# Altium PCB 底板20160428.PcbDoc (part 4 of 5)
Units mm, origin at the board's own origin, x right, y up, seen from the top; angles counter-clockwise.
Board outline 123.5 x 102.51 mm, 2 copper layers (Top Layer, Bottom Layer); 219 components, 217 nets, 791 pads, 260 vias.
Unrouted connection lines stored in the file: 1.
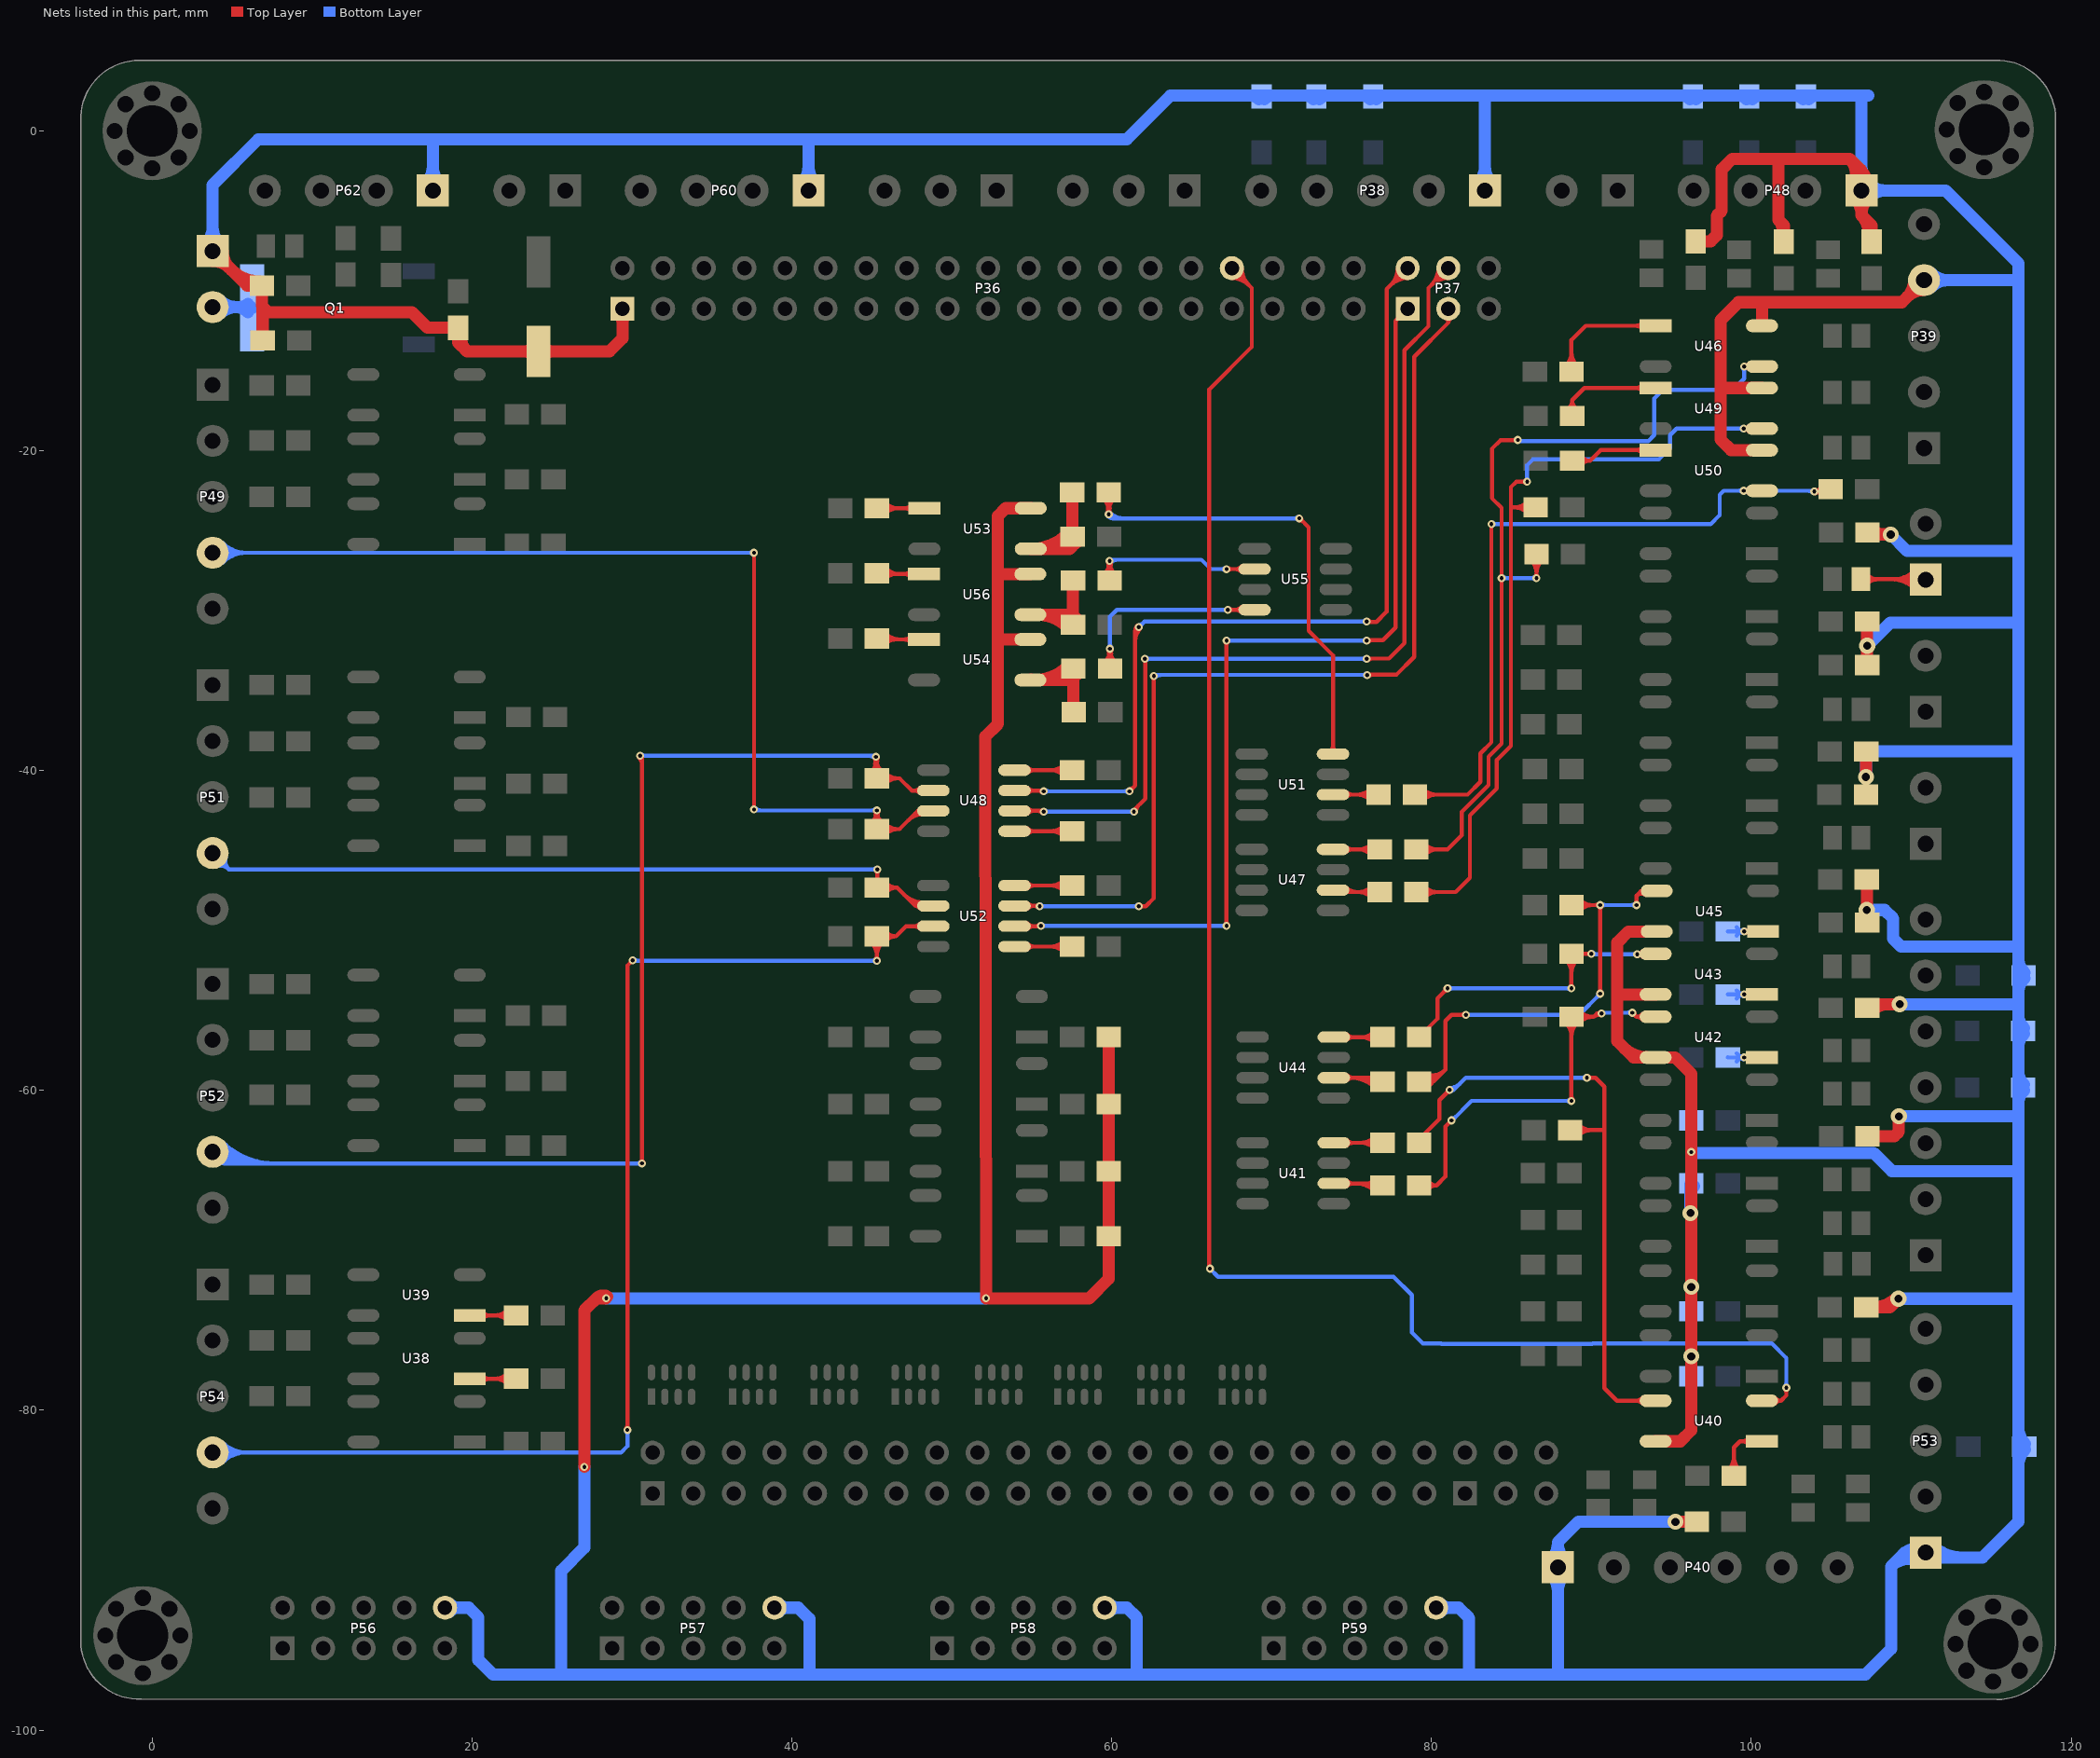
[diagram p4: the nets of this part, all layers, seen from the top]

## Via types
v1: diameter 0.5, hole 0.25, Top Layer to Bottom Layer, 233 vias
v2: diameter 1, hole 0.5, Top Layer to Bottom Layer, 27 vias

## Nets (pads, with @x,y where several pads share a name; then routed paths per layer and width w, separated by ;. In a path a pad name is that pad's centre, name@x,y a point inside that pad or via, vN(x,y) a via of type N, cw(c..) or ccw(c..) an arc to the next point about the centre after c; other vN are vias at no path point) (continued)
NetR92_1: R92.1 U38.1 | length 5.9
  Top Layer w0.254: U38.1@19.862,-78.029 R92.1@22.758,-78.029 ; U38.1@20.651,-78.225 cw(c21.126,-78.7) 21.126,-78.029 ; U38.1@20.651,-77.839 ccw(c21.108,-77.382) 21.108,-78.029 ; R92.1@22.272,-78.388 ccw(c21.405,-79.255) 21.405,-78.029 ccw(c21.405,-76.802) R92.1@22.272,-77.67
NetR94_1: R94.1 U39.1 | length 5.9
  Top Layer w0.254: U39.1@19.859,-74.066 R94.1@22.758,-74.066 ; U39.1@20.651,-74.258 cw(c21.115,-74.722) 21.115,-74.066 ; U39.1@20.651,-73.872 ccw(c21.12,-73.404) 21.12,-74.066 ; R94.1@22.272,-74.426 ccw(c21.405,-75.293) 21.405,-74.066 ccw(c21.405,-72.84) R94.1@22.272,-73.707
NetR96_1: R96.1 U40.1 | length 6.7
  Top Layer w0.254: R96.1@98.548,-83.74 ccw(c97.681,-82.873) 98.908,-82.873 ccw(c100.134,-82.873) R96.1@99.267,-83.74 ; R96.1@98.908,-84.099 98.908,-82.321 99.29,-81.939 U40.1@100.66,-81.939 U40.1@100.732,-81.939 ; U40.1@99.867,-82.132 ccw(c99.401,-82.598) 99.401,-81.939 ccw(c99.401,-81.28) U40.1@99.867,-81.746
NetR98_2: R98.2 R99.2 U40.4 | length 44.3
  Top Layer w0.254: R98.2@79.223,-63.271 79.223,-63.061 80.493,-61.791 80.493,-60.604 v1(81.128,-59.969) ; v1@81.005,-59.969 cw(c80.708,-59.969) 80.918,-60.179 cw(c81.128,-60.389) v1@81.128,-60.092 ; R99.2@88.671,-62.484 90.805,-62.484 ; R99.2@89.158,-62.843 cw(c90.025,-63.71) 90.025,-62.484 cw(c90.025,-61.258) R99.2@89.158,-62.125 ; v1(89.713,-59.207) 90.246,-59.207 90.805,-59.766 90.805,-62.484 ; v1@89.8,-59.294 cw(c90.01,-59.504) 90.01,-59.207 cw(c90.01,-58.91) v1@89.8,-59.12 ; U40.4@93.217,-79.592 ccw(c92.751,-80.058) 92.751,-79.399 ccw(c92.751,-78.74) U40.4@93.217,-79.206 ; U40.4@94.082,-79.399 U40.4@94.01,-79.399 91.591,-79.399 90.805,-78.613 90.805,-62.484
  Bottom Layer w0.254: v1(81.128,-59.969) 81.382,-59.969 ; v1@81.128,-59.846 ccw(c81.128,-58.936) 81.771,-59.58 ; v1@81.224,-60.046 cw(c81.382,-60.17) 81.382,-59.969 ; v1@81.224,-59.893 ccw(c81.382,-59.769) 81.382,-59.969 ; v1@89.626,-59.294 ccw(c89.416,-59.504) 89.416,-59.207 ccw(c89.416,-58.91) v1@89.626,-59.12 ; v1(89.713,-59.207) 82.144,-59.207 81.382,-59.969
NetR100_1: R100.1 U42.1 | length 5.7
  Top Layer w0.254: v1(99.544,-57.938) v1(99.544,-57.938) ; v1@99.631,-58.025 cw(c99.845,-58.24) U42.1@99.845,-57.936 ; v1@99.631,-57.851 ccw(c99.836,-57.646) U42.1@99.836,-57.936 ; U42.1@99.835,-58.09 ccw(c99.544,-58.289) v1(99.544,-57.938) ; U42.1@99.835,-57.783 cw(c99.544,-57.584) v1(99.544,-57.938) ; U42.1@100.732,-57.936 U42.1@100.66,-57.936 v1(99.544,-57.938)
  Bottom Layer w0.254: R100.1@98.527,-57.937 R100.1@98.527,-57.937 v1(99.544,-57.938) ; R100.1@99.091,-58.196 cw(c99.544,-58.465) v1(99.544,-57.938) ; R100.1@99.091,-57.68 ccw(c99.544,-57.414) v1(99.544,-57.938) ; v1@99.433,-57.993 ccw(c99.22,-58.098) 99.281,-57.868 ccw(c99.343,-57.638) v1@99.475,-57.836 ; v1@99.433,-57.884 cw(c99.218,-57.777) 99.28,-58.009 cw(c99.343,-58.241) v1@99.476,-58.041 ; v1@99.457,-58.025 ccw(c99.247,-58.235) 99.247,-57.938 ccw(c99.247,-57.641) v1@99.457,-57.851
NetR102_2: R102.2 R103.2 U42.4 | length 33.4
  Top Layer w0.254: R102.2@79.223,-65.938 80.315,-65.938 ; R102.2@79.768,-66.226 cw(c80.315,-66.601) 80.315,-65.938 ; R102.2@79.768,-65.651 ccw(c80.315,-65.276) 80.315,-65.938 ; v1(81.255,-61.874) 80.874,-62.255 80.874,-65.38 80.315,-65.938 ; R103.2@88.388,-55.757 cw(c87.521,-56.624) 88.748,-56.624 cw(c89.974,-56.624) R103.2@89.107,-55.757 ; v1@88.661,-60.568 ccw(c88.451,-60.358) 88.748,-60.358 ccw(c89.045,-60.358) v1@88.835,-60.568 ; v1(88.748,-60.655) R103.2@88.748,-55.397 90.145,-55.397 ; R103.2@89.234,-55.757 cw(c90.101,-56.624) 90.101,-55.397 cw(c90.101,-54.171) R103.2@89.234,-55.038 ; v1@90.536,-55.277 ccw(c90.348,-55.45) 90.348,-55.194 ; v1@90.536,-55.111 cw(c90.348,-54.938) 90.348,-55.194 ; v1@90.581,-55.308 ccw(c90.43,-55.683) 90.145,-55.397 ; v1(90.627,-55.194) 90.348,-55.194 ; v1@92.558,-55.266 cw(c92.558,-55.563) 92.768,-55.353 cw(c92.978,-55.143) v1@92.681,-55.143 ; v1(92.558,-55.143) 92.811,-55.396 ; U42.4@93.204,-55.576 ccw(c92.811,-55.918) 92.811,-55.396 ; U42.4@93.204,-55.217 cw(c92.811,-54.875) 92.811,-55.396 ; U42.4@94.081,-55.397 94.082,-55.396 U42.4@94.01,-55.396 92.811,-55.396 ; 90.145,-55.397 90.348,-55.194
  Bottom Layer w0.254: v1(81.255,-61.874) 81.287,-61.874 82.506,-60.655 v1(88.748,-60.655) ; v1@81.255,-61.751 ccw(c81.255,-61.376) 81.52,-61.641 ; v1@88.661,-60.742 ccw(c88.451,-60.952) 88.451,-60.655 ccw(c88.451,-60.358) v1@88.661,-60.568 ; v1(90.627,-55.194) 90.627,-55.169 90.653,-55.143 v1(92.558,-55.143) ; v1@92.471,-55.23 ccw(c92.261,-55.44) 92.261,-55.143 ccw(c92.261,-54.846) v1@92.471,-55.056
NetR104_1: R104.1 U43.1 | length 5.7
  Top Layer w0.254: v1(99.543,-54) v1(99.543,-54) ; v1@99.63,-54.087 cw(c99.842,-54.3) U43.1@99.842,-53.999 ; v1@99.63,-53.913 ccw(c99.837,-53.706) U43.1@99.837,-53.999 ; U43.1@99.835,-54.153 ccw(c99.544,-54.352) v1(99.543,-54) ; U43.1@99.835,-53.846 cw(c99.544,-53.647) v1(99.543,-54) ; U43.1@100.732,-53.999 U43.1@100.66,-53.999 v1(99.543,-54)
  Bottom Layer w0.254: R104.1@98.527,-54 v1(99.543,-54) ; R104.1@99.091,-54.258 cw(c99.543,-54.524) v1(99.543,-54) ; R104.1@99.091,-53.743 ccw(c99.543,-53.477) v1(99.543,-54) ; v1@99.432,-54.055 ccw(c99.219,-54.16) 99.281,-53.93 ccw(c99.342,-53.701) v1@99.474,-53.898 ; v1@99.432,-53.946 cw(c99.219,-53.841) 99.281,-54.071 cw(c99.342,-54.3) v1@99.474,-54.103 ; v1@99.456,-54.087 ccw(c99.246,-54.297) 99.246,-54 ccw(c99.246,-53.703) v1@99.456,-53.913
NetR107_2: R107.2 R108.2 U43.4 | length 24.9
  Top Layer w0.254: R107.2@79.731,-56.667 R107.2@79.223,-56.667 80.366,-55.524 80.366,-54.254 v1(81.001,-53.619) ; v1@80.878,-53.619 cw(c80.581,-53.619) 80.791,-53.829 cw(c81.001,-54.039) v1@81.001,-53.742 ; R108.2@88.388,-51.82 cw(c87.521,-52.687) 88.748,-52.687 cw(c89.974,-52.687) R108.2@89.107,-51.82 ; v1@88.661,-53.532 ccw(c88.451,-53.322) 88.748,-53.322 ccw(c89.045,-53.322) v1@88.835,-53.532 ; v1(88.748,-53.619) R108.2@88.748,-51.46 v1(89.992,-51.46) ; v1@92.949,-51.573 cw(c93.159,-51.783) 93.159,-51.486 cw(c93.159,-51.189) v1@92.949,-51.399 ; U43.4@93.18,-51.312 cw(c92.862,-51.108) v1(92.862,-51.486) ; U43.4@93.206,-51.64 ccw(c92.862,-51.944) v1(92.862,-51.486) ; U43.4@94.081,-51.46 94.082,-51.459 U43.4@94.01,-51.459 93.984,-51.486 v1(92.862,-51.486)
  Bottom Layer w0.254: v1(81.001,-53.619) v1(88.748,-53.619) ; v1@81.088,-53.706 cw(c81.298,-53.916) 81.298,-53.619 cw(c81.298,-53.322) v1@81.088,-53.532 ; v1@88.661,-53.706 ccw(c88.451,-53.916) 88.451,-53.619 ccw(c88.451,-53.322) v1@88.661,-53.532 ; v1(89.992,-51.46) 90.018,-51.486 v1(92.862,-51.486) ; v1@90.079,-51.373 ccw(c90.35,-51.102) 90.35,-51.486
NetR109_1: R109.1 U45.1 | length 6.6
  Top Layer w0.254: v1(99.543,-50.063) v1(99.543,-50.063) ; v1@99.614,-49.963 ccw(c99.738,-49.789) 99.793,-49.996 ccw(c99.848,-50.2) v1@99.655,-50.114 ; v1@99.616,-50.162 cw(c99.738,-50.323) 99.79,-50.128 cw(c99.843,-49.929) v1@99.655,-50.013 ; v1@99.63,-50.15 cw(c99.842,-50.363) U45.1@99.842,-50.062 ; v1@99.63,-49.976 ccw(c99.837,-49.769) U45.1@99.837,-50.062 ; U45.1@99.923,-50.239 ccw(c99.544,-50.559) v1(99.543,-50.063) ; U45.1@99.923,-49.886 cw(c99.544,-49.566) v1(99.543,-50.063) ; U45.1@100.732,-50.062 v1(99.543,-50.063)
  Bottom Layer w0.254: R109.1@98.527,-50.063 v1(99.543,-50.063) ; R109.1@99.091,-50.321 cw(c99.543,-50.587) v1(99.543,-50.063) ; R109.1@99.091,-49.806 ccw(c99.543,-49.54) v1(99.543,-50.063) ; v1@99.432,-50.118 ccw(c99.219,-50.223) 99.281,-49.993 ccw(c99.342,-49.764) v1@99.474,-49.961 ; v1@99.432,-50.009 cw(c99.219,-49.904) 99.281,-50.134 cw(c99.342,-50.363) v1@99.474,-50.166 ; v1@99.456,-50.15 ccw(c99.246,-50.36) 99.246,-50.063 ccw(c99.246,-49.766) v1@99.456,-49.976
NetR111_2: R111.2 R112.2 U45.4 | length 39
  Top Layer w0.254: R111.2@79.223,-59.461 80.112,-59.461 ; R111.2@79.259,-59.699 ccw(c79.521,-59.011) 80.042,-59.531 ; R111.2@79.35,-59.461 ccw(c79.674,-58.609) 80.319,-59.254 ; R111.2@79.44,-59.224 ccw(c79.827,-58.208) 80.596,-58.977 ; R111.2@79.53,-58.987 ccw(c79.98,-57.806) 80.874,-58.699 ; R111.2@79.819,-59.657 cw(c80.112,-59.779) 80.112,-59.461 ; R111.2@79.819,-59.266 ccw(c80.112,-59.144) 80.112,-59.461 ; v1@82.057,-55.357 ccw(c81.847,-55.567) 81.847,-55.27 ccw(c81.847,-54.973) v1@82.057,-55.183 ; v1(82.144,-55.27) 81.255,-55.27 80.874,-55.651 80.874,-58.699 ; R112.2@88.748,-48.412 v1(90.551,-48.412) v1(90.551,-53.95) ; R112.2@89.234,-48.772 cw(c90.101,-49.639) 90.101,-48.412 cw(c90.101,-47.186) R112.2@89.234,-48.053 ; v1@90.464,-53.863 ccw(c90.254,-53.653) 90.551,-53.653 ccw(c90.848,-53.653) v1@90.638,-53.863 ; v1@90.464,-48.325 cw(c90.254,-48.115) 90.254,-48.412 cw(c90.254,-48.709) 90.464,-48.499 cw(c90.254,-48.709) 90.551,-48.709 cw(c90.848,-48.709) v1@90.638,-48.499 ; v1@92.725,-48.325 ccw(c92.515,-48.115) 92.812,-48.115 ccw(c93.109,-48.115) v1@92.899,-48.325 ; v1(92.812,-48.412) 92.812,-47.828 ; 93.045,-47.595 cw(c93.295,-47.844) U45.4@93.472,-47.539 ; U45.4@93.345,-47.759 ccw(c93.123,-48.14) 92.812,-47.828 ; U45.4@94.082,-47.522 93.117,-47.522 92.812,-47.828 ; 80.112,-59.461 80.874,-58.699
  Bottom Layer w0.254: v1(82.144,-55.27) 89.23,-55.27 v1(90.551,-53.95) ; v1@90.428,-53.95 cw(c90.131,-53.95) 90.341,-54.16 cw(c90.551,-54.37) v1@90.551,-54.073 ; v1(90.551,-48.412) v1(92.812,-48.412) ; v1@90.638,-48.499 cw(c90.848,-48.709) 90.848,-48.412 cw(c90.848,-48.115) v1@90.638,-48.325 ; v1@92.725,-48.499 ccw(c92.515,-48.709) 92.515,-48.412 ccw(c92.515,-48.115) v1@92.725,-48.325
NetR113_1: R113.1 U46.1 | length 10.6
  Top Layer w0.254: R113.1@88.388,-14.703 ccw(c87.521,-13.836) 88.748,-13.836 ccw(c89.974,-13.836) R113.1@89.107,-14.703 ; R113.1@88.748,-15.062 88.748,-13.081 89.636,-12.193 U46.1@94.01,-12.193 ; U46.1@93.217,-12.386 ccw(c92.751,-12.852) 92.751,-12.193 ccw(c92.751,-11.534) U46.1@93.217,-12
NetR115_1: R115.1 U48.4 | length 6.4
  Top Layer w0.254: U48.4@53.924,-39.98 R115.1@57.531,-39.98 ; U48.4@54.746,-40.141 cw(c55.136,-40.531) 55.136,-39.98 cw(c55.136,-39.428) U48.4@54.746,-39.818 ; R115.1@57.045,-40.339 ccw(c56.178,-41.206) 56.178,-39.98 ccw(c56.178,-38.753) R115.1@57.045,-39.62
NetR116_2: R116.2 R118.2 U46.4 | length 60.4
  Top Layer w0.254: R116.2@79.045,-44.933 81.001,-44.933 81.89,-44.044 81.89,-42.589 83.566,-40.912 83.566,-39.134 84.379,-38.321 v1(84.379,-27.965) 84.379,-23.571 83.776,-22.968 83.776,-19.882 84.303,-19.355 85.369,-19.355 v1(85.395,-19.329) ; R116.2@79.531,-45.292 cw(c80.398,-46.159) 80.398,-44.933 cw(c80.398,-43.706) R116.2@79.531,-44.573 ; 85.037,-19.355 ccw(c85.037,-18.971) v1@85.308,-19.242 ; R118.2@86.204,-26.826 cw(c85.337,-27.693) 86.563,-27.693 cw(c87.79,-27.693) R118.2@86.922,-26.826 ; v1@86.476,-27.878 ccw(c86.266,-27.668) 86.563,-27.668 ccw(c86.86,-27.668) v1@86.65,-27.878 ; v1(86.563,-27.965) R118.2@86.563,-26.467 ; v1@99.631,-14.82 cw(c99.841,-15.03) 99.841,-14.733 cw(c99.841,-14.436) v1@99.631,-14.646 ; U46.4@99.835,-14.887 ccw(c99.544,-15.085) v1(99.544,-14.733) ; U46.4@99.835,-14.579 cw(c99.544,-14.381) v1(99.544,-14.733) ; U46.4@100.66,-14.733 v1(99.544,-14.733)
  Bottom Layer w0.254: v1(84.379,-27.965) v1(86.563,-27.965) ; v1@84.466,-28.052 cw(c84.676,-28.262) 84.676,-27.965 cw(c84.676,-27.668) v1@84.466,-27.878 ; v1(85.395,-19.329) 85.466,-19.4 93.554,-19.4 93.929,-19.025 93.929,-16.739 94.463,-16.205 98.831,-16.205 99.544,-15.493 v1(99.544,-14.733) ; v1@86.476,-28.052 ccw(c86.266,-28.262) 86.266,-27.965 ccw(c86.266,-27.668) v1@86.476,-27.878 ; v1@99.457,-14.82 cw(c99.247,-15.03) 99.544,-15.03 cw(c99.841,-15.03) v1@99.631,-14.82
NetR119_1: R119.1 U49.1 | length 8.9
  Top Layer w0.254: R119.1@88.502,-17.418 ccw(c88.087,-16.84) 88.798,-16.84 ; R119.1@88.798,-17.831 88.798,-16.84 ; R119.1@89.095,-17.418 cw(c89.51,-16.84) 88.798,-16.84 ; U49.1@93.217,-16.272 ccw(c92.751,-16.738) 92.751,-16.079 ccw(c92.751,-15.42) U49.1@93.217,-15.886 ; U49.1@94.01,-16.079 89.559,-16.079 88.798,-16.84
NetR122_1: R122.1 U48.1 | length 6.4
  Top Layer w0.254: U48.1@53.924,-43.79 R122.1@57.531,-43.79 ; U48.1@54.746,-43.951 cw(c55.136,-44.341) 55.136,-43.79 cw(c55.136,-43.238) U48.1@54.746,-43.628 ; R122.1@57.045,-44.149 ccw(c56.178,-45.016) 56.178,-43.79 ccw(c56.178,-42.563) R122.1@57.045,-43.43
NetR123_2: R123.2 R124.2 U49.4 | length 55.5
  Top Layer w0.254: R123.2@79.045,-47.6 81.509,-47.6 82.398,-46.711 82.398,-42.799 84.074,-41.123 84.074,-39.345 84.963,-38.456 84.963,-23.571 ; R123.2@79.531,-47.959 cw(c80.398,-48.826) 80.398,-47.6 cw(c80.398,-46.373) R123.2@79.531,-47.24 ; v1@85.892,-22.033 ccw(c85.682,-22.243) 85.682,-21.946 ccw(c85.682,-21.649) v1@85.892,-21.859 ; v1(85.979,-21.946) 85.293,-21.946 84.963,-22.276 84.963,-23.571 ; R124.2@86.026,-23.905 ccw(c85.159,-24.772) 85.159,-23.546 ccw(c85.159,-22.319) R124.2@86.026,-23.187 ; R124.2@86.512,-23.546 84.988,-23.546 84.963,-23.571 ; v1@99.605,-18.706 cw(c99.815,-18.916) 99.815,-18.619 cw(c99.815,-18.322) v1@99.605,-18.532 ; U49.4@99.841,-18.782 ccw(c99.518,-19.021) v1(99.518,-18.619) ; U49.4@99.841,-18.457 cw(c99.518,-18.218) v1(99.518,-18.619) ; U49.4@100.66,-18.619 v1(99.518,-18.619)
  Bottom Layer w0.254: v1@85.892,-21.859 ccw(c85.682,-21.649) 85.979,-21.649 ccw(c86.276,-21.649) v1@86.066,-21.859 ; v1(85.979,-21.946) 85.979,-20.904 86.335,-20.549 94.209,-20.549 94.92,-19.837 94.92,-19.025 95.325,-18.619 v1(99.518,-18.619) ; v1@99.431,-18.706 ccw(c99.221,-18.916) 99.221,-18.619 ccw(c99.221,-18.322) v1@99.431,-18.532
NetR125_1: R125.1 U50.1 | length 7.9
  Top Layer w0.254: R125.1@88.798,-20.625 89.916,-20.625 ; R125.1@89.338,-20.921 cw(c89.916,-21.337) 89.916,-20.625 ; R125.1@89.338,-20.328 ccw(c89.916,-19.913) 89.916,-20.625 ; U50.1@93.217,-20.158 ccw(c92.751,-20.624) 92.751,-19.965 ccw(c92.751,-19.306) U50.1@93.217,-19.772 ; U50.1@94.01,-19.965 90.575,-19.965 89.916,-20.625
NetR127_2: R127.2 R128.2 U50.4 | length 51.7
  Top Layer w0.254: R127.2@78.969,-41.504 82.256,-41.504 83.058,-40.702 83.058,-38.924 83.744,-38.238 v1(83.744,-24.587) ; R127.2@79.455,-41.863 cw(c80.322,-42.73) 80.322,-41.504 cw(c80.322,-40.277) R127.2@79.455,-41.144 ; v1@99.605,-22.592 cw(c99.815,-22.802) 99.815,-22.505 cw(c99.815,-22.208) v1@99.605,-22.418 ; U50.4@99.841,-22.668 ccw(c99.518,-22.907) v1(99.518,-22.505) ; U50.4@99.841,-22.343 cw(c99.518,-22.104) v1(99.518,-22.505) ; U50.4@100.66,-22.505 v1(99.518,-22.505) ; v1@103.967,-22.555 cw(c103.967,-23.261) R128.2@104.467,-22.762 ; v1@103.998,-22.662 cw(c104.16,-22.942) R128.2@104.244,-22.629 ; v1@104.024,-22.642 cw(c104.234,-22.852) 104.234,-22.555 cw(c104.234,-22.258) v1@104.024,-22.468 ; v1@104.043,-22.494 ccw(c104.277,-22.359) R128.2@104.207,-22.619 ; R128.2@104.339,-22.256 cw(c103.937,-22.135) v1(103.937,-22.555) R128.2@104.953,-22.555
  Bottom Layer w0.254: v1(83.744,-24.587) 97.46,-24.587 98.019,-24.028 98.019,-22.758 98.272,-22.505 v1(99.518,-22.505) 103.887,-22.505 v1(103.937,-22.555) ; v1@83.831,-24.674 cw(c84.041,-24.884) 84.041,-24.587 cw(c84.041,-24.29) v1@83.831,-24.5 ; v1@99.431,-22.592 ccw(c99.221,-22.802) 99.221,-22.505 ccw(c99.221,-22.208) v1@99.431,-22.418 ; v1@99.605,-22.592 cw(c99.815,-22.802) 99.815,-22.505 cw(c99.815,-22.208) v1@99.605,-22.418 ; 103.52,-22.505 cw(c103.52,-22.972) v1@103.85,-22.642
NetR129_1: R129.1 U52.4 | length 6.4
  Top Layer w0.254: U52.4@53.924,-47.193 R129.1@57.531,-47.193 ; U52.4@54.746,-47.355 cw(c55.136,-47.745) 55.136,-47.193 cw(c55.136,-46.641) U52.4@54.746,-47.032 ; R129.1@57.045,-47.552 ccw(c56.178,-48.42) 56.178,-47.193 ccw(c56.178,-45.967) R129.1@57.045,-46.834
NetR130_1: R130.1 U53.1 | length 5.9
  Top Layer w0.254: R130.1@45.314,-23.597 U53.1@48.29,-23.598 ; R130.1@45.8,-23.956 cw(c46.665,-24.821) 46.665,-23.598 ; R130.1@45.8,-23.237 ccw(c46.669,-22.368) 46.669,-23.598 ; U53.1@47.497,-23.791 ccw(c47.031,-24.257) 47.031,-23.598 ccw(c47.031,-22.939) U53.1@47.497,-23.405
NetR133_2: R133.2 R135.2 U53.4 | length 10.2
  Top Layer w0.762: U53.4@54.94,-26.138 U53.4@54.94,-26.138 57.378,-26.138 57.531,-25.984 R133.2@57.531,-22.606 ; U53.4@54.974,-26.138 ccw(c54.974,-22.919) R135.2@57.25,-25.195 ; 56.814,-26.138 ccw(c56.814,-24.759) R135.2@57.789,-25.734 ; 57.531,-24.7 ccw(c58.231,-24.7) R135.2@57.736,-25.195
NetR136_1: R136.1 U52.1 | length 6.4
  Top Layer w0.254: U52.1@53.924,-51.003 R136.1@57.531,-51.003 ; U52.1@54.746,-51.165 cw(c55.136,-51.555) 55.136,-51.003 cw(c55.136,-50.451) U52.1@54.746,-50.842 ; R136.1@57.045,-51.362 ccw(c56.178,-52.23) 56.178,-51.003 ccw(c56.178,-49.777) R136.1@57.045,-50.644
NetR137_1: R137.1 U54.1 | length 6.5
  Top Layer w0.254: R137.1@45.365,-31.802 U54.1@48.265,-31.802 ; R137.1@45.62,-31.57 ccw(c46.179,-31.012) 46.179,-31.802 ; R137.1@45.8,-32.109 cw(c46.542,-32.851) 46.542,-31.802 ; R137.1@45.8,-31.391 ccw(c46.792,-30.398) 46.792,-31.802 ; U54.1@47.472,-31.995 ccw(c47.006,-32.461) 47.006,-31.802 ccw(c47.006,-31.143) U54.1@47.472,-31.609
NetR139_2: R139.2 R140.2 U54.4 | length 8.7
  Top Layer w0.762: U54.4@54.941,-34.315 U54.4@54.915,-34.342 57.53,-34.342 57.607,-34.265 57.607,-36.322 R140.2@57.633,-36.347 ; U54.4@55.148,-34.342 ccw(c55.148,-31.297) R139.2@57.301,-33.45 ; 56.987,-34.342 ccw(c56.987,-33.137) R139.2@57.839,-33.989 ; 57.607,-35.673 ccw(c58.307,-35.673) R140.2@57.812,-36.168
NetR141_1: R141.1 U56.1 | length 6.5
  Top Layer w0.254: R141.1@45.365,-27.712 U56.1@48.265,-27.712 ; R141.1@45.62,-27.481 ccw(c46.179,-26.922) 46.179,-27.712 ; R141.1@45.8,-28.02 cw(c46.542,-28.762) 46.542,-27.712 ; R141.1@45.8,-27.301 ccw(c46.792,-26.309) 46.792,-27.712 ; U56.1@47.472,-27.905 ccw(c47.006,-28.371) 47.006,-27.712 ccw(c47.006,-27.053) U56.1@47.472,-27.519
NetR143_2: R143.2 R144.2 U56.4 | length 7.7
  Top Layer w0.762: U56.4@54.915,-30.252 U56.4@54.915,-30.252 57.505,-30.252 57.582,-30.175 R143.2@57.582,-28.118 ; U56.4@55.311,-30.252 cw(c55.311,-33.03) R144.2@57.275,-31.066 ; R144.2@57.151,-30.252 cw(c57.151,-31.191) R144.2@57.814,-30.527
O13: R98.1 U41.4 | length 5.8
  Top Layer w0.254: U41.4@73.882,-63.279 R98.1@76.929,-63.279 ; U41.4@74.711,-63.433 cw(c75.082,-63.805) 75.082,-63.279 ; U41.4@74.711,-63.11 ccw(c75.119,-62.701) 75.119,-63.279 ; 75.565,-63.279 ccw(c75.565,-62.027) R98.1@76.45,-62.912 ; 75.602,-63.279 cw(c75.602,-64.479) R98.1@76.45,-63.631
O14: R102.1 U41.2 | length 6.5
  Top Layer w0.254: U41.2@73.882,-65.819 R102.1@76.817,-65.819 ; U41.2@74.711,-65.973 cw(c75.082,-66.345) 75.082,-65.819 ; U41.2@74.711,-65.65 ccw(c75.119,-65.241) 75.119,-65.819 ; 75.295,-65.819 cw(c75.295,-67.453) R102.1@76.45,-66.298 ; 75.871,-65.819 ccw(c75.871,-65) R102.1@76.45,-65.579 ; 75.908,-65.819 cw(c75.908,-66.84) R102.1@76.63,-66.118
O15: R107.1 U44.4 | length 5.8
  Top Layer w0.254: U44.4@73.882,-56.675 R107.1@76.929,-56.675 ; U44.4@74.711,-56.829 cw(c75.082,-57.201) 75.082,-56.675 ; U44.4@74.711,-56.506 ccw(c75.119,-56.097) 75.119,-56.675 ; 75.565,-56.675 ccw(c75.565,-55.423) R107.1@76.45,-56.308 ; 75.602,-56.675 cw(c75.602,-57.875) R107.1@76.45,-57.027
O16: R111.1 U44.2 | length 7.4
  Top Layer w0.254: U44.2@73.882,-59.215 R111.1@76.69,-59.215 ; U44.2@74.711,-59.369 cw(c75.082,-59.741) 75.082,-59.215 ; U44.2@74.711,-59.046 ccw(c75.119,-58.637) 75.119,-59.215 ; 74.988,-59.215 cw(c74.988,-61.283) R111.1@76.45,-59.821 ; 75.602,-59.215 cw(c75.602,-60.669) R111.1@76.63,-59.641 ; R111.1@76.178,-59.215 ccw(c76.178,-58.83) R111.1@76.45,-59.102 ; R111.1@76.215,-59.215 cw(c76.215,-60.056) R111.1@76.81,-59.461
O17: R116.1 U47.4 | length 5.7
  Top Layer w0.254: U47.4@73.838,-44.933 R116.1@76.759,-44.933 ; U47.4@74.66,-45.094 cw(c75.05,-45.484) 75.05,-44.933 cw(c75.05,-44.381) U47.4@74.66,-44.771 ; R116.1@76.273,-45.292 ccw(c75.405,-46.159) 75.405,-44.933 ccw(c75.405,-43.706) R116.1@76.273,-44.573
O18: R123.1 U47.2 | length 5.7
  Top Layer w0.254: U47.2@73.838,-47.473 73.965,-47.6 R123.1@76.759,-47.6 ; U47.2@74.66,-47.311 ccw(c75.357,-46.614) 75.357,-47.6 ; R123.1@76.273,-47.959 ccw(c75.405,-48.826) 75.405,-47.6 ccw(c75.405,-46.373) R123.1@76.273,-47.24
O19: R127.1 U51.2 | length 5.6
  Top Layer w0.254: U51.2@73.838,-41.504 R127.1@76.683,-41.504 ; U51.2@74.66,-41.665 cw(c75.05,-42.055) 75.05,-41.504 cw(c75.05,-40.952) U51.2@74.66,-41.342 ; R127.1@76.196,-41.863 ccw(c75.329,-42.73) 75.329,-41.504 ccw(c75.329,-40.277) R127.1@76.196,-41.144
O20: R133.1 U51.4 | length 35.7
  Top Layer w0.254: R133.1@59.458,-22.965 cw(c58.591,-23.832) 59.817,-23.832 cw(c61.043,-23.832) R133.1@60.176,-22.965 ; v1@59.71,-23.916 ccw(c59.342,-23.703) 59.753,-23.593 ; v1@59.73,-23.891 ccw(c59.52,-23.681) 59.817,-23.681 ccw(c60.114,-23.681) v1@59.904,-23.891 ; v1(59.817,-23.978) R133.1@59.817,-22.606 ; 59.881,-23.593 ccw(c60.292,-23.703) v1@59.924,-23.916 ; v1@71.73,-24.355 cw(c71.73,-24.713) 71.983,-24.46 ; v1@71.755,-24.232 72.314,-24.79 72.314,-31.267 73.838,-32.791 U51.4@73.838,-38.964 ; v1@71.853,-24.232 ccw(c72.088,-24.232) 71.922,-24.398 ; U51.4@73.676,-38.802 ccw(c73.286,-38.412) 73.838,-38.412 ccw(c74.39,-38.412) U51.4@73.999,-38.802
  Bottom Layer w0.254: v1@59.724,-24.07 ccw(c60.114,-23.681) 60.114,-24.232 ; v1@59.817,-24.101 cw(c59.817,-24.398) 60.027,-24.188 cw(c60.237,-23.978) v1@59.94,-23.978 ; v1(59.817,-23.978) 60.071,-24.232 v1(71.73,-24.232) ; v1@59.904,-23.891 ccw(c60.727,-23.067) 60.727,-24.232 ; v1@71.643,-24.319 ccw(c71.433,-24.529) 71.433,-24.232 ccw(c71.433,-23.935) v1@71.643,-24.145
O21: R139.1 U55.4 | length 17.6
  Top Layer w0.254: R139.1@59.534,-33.27 ccw(c58.667,-32.403) 59.893,-32.403 ccw(c61.12,-32.403) R139.1@60.252,-33.27 ; v1@59.787,-32.447 cw(c59.516,-32.603) 59.818,-32.684 ; v1@59.806,-32.472 cw(c59.596,-32.682) 59.893,-32.682 cw(c60.19,-32.682) v1@59.98,-32.472 ; 59.824,-32.662 cw(c60.095,-32.735) v1@59.955,-32.492 ; v1@59.832,-32.492 cw(c59.691,-32.735) 59.963,-32.662 ; R139.1@59.893,-33.63 v1(59.893,-32.385) ; 59.968,-32.684 cw(c60.271,-32.603) v1@60,-32.446 ; v1(67.259,-29.947) U55.4@68.936,-29.947 ; v1@67.346,-30.034 cw(c67.556,-30.244) 67.556,-29.947 cw(c67.556,-29.65) v1@67.346,-29.86 ; U55.4@68.114,-30.108 ccw(c67.723,-30.498) 67.723,-29.947 ccw(c67.723,-29.395) U55.4@68.114,-29.785
  Bottom Layer w0.254: v1@59.806,-32.298 ccw(c59.596,-32.088) 59.893,-32.088 ccw(c60.19,-32.088) v1@59.98,-32.298 ; v1(59.893,-32.385) 59.893,-30.378 60.325,-29.947 v1(67.259,-29.947)
O22: R143.1 U55.2 | length 16.1
  Top Layer w0.254: R143.1@59.51,-27.757 ccw(c58.659,-26.899) v1(59.868,-26.899) ; v1@59.761,-26.96 cw(c59.504,-27.109) 59.791,-27.185 ; v1@59.781,-26.986 cw(c59.571,-27.196) 59.868,-27.196 cw(c60.165,-27.196) v1@59.955,-26.986 ; 59.791,-27.185 cw(c60.078,-27.262) v1@59.929,-27.005 ; v1@59.806,-27.005 cw(c59.658,-27.262) 59.945,-27.185 ; R143.1@59.868,-28.118 v1(59.868,-26.899) ; 59.945,-27.185 cw(c60.232,-27.109) v1@59.974,-26.96 ; R143.1@60.225,-27.757 cw(c61.077,-26.899) v1(59.868,-26.899) ; v1(67.183,-27.407) U55.2@68.936,-27.407 ; v1@67.27,-27.494 cw(c67.48,-27.704) 67.48,-27.407 cw(c67.48,-27.11) v1@67.27,-27.32 ; U55.2@68.114,-27.568 ccw(c67.723,-27.958) 67.723,-27.407 ccw(c67.723,-26.855) U55.2@68.114,-27.245
  Bottom Layer w0.254: v1(59.868,-26.899) 59.944,-26.822 65.608,-26.822 66.192,-27.407 v1(67.183,-27.407) ; v1@59.955,-26.986 cw(c60.349,-27.38) 60.349,-26.822 ; v1@67.096,-27.494 ccw(c66.886,-27.704) 66.886,-27.407 ccw(c66.886,-27.11) v1@67.096,-27.32
PW_GND: J4.2 Q1.2 | length 6.3
  Top Layer w0.762: J4.2@3.785,-11.018 J4.2@3.805,-10.998
  Bottom Layer w0.762: J4.2@3.785,-11.018 6.192,-11.018 Q1.2@6.248,-11.074 ; J4.2@4.222,-11.456 cw(c5.279,-12.513) 5.279,-11.018 cw(c5.279,-9.524) J4.2@4.222,-10.581 ; 5.222,-11.018 cw(c5.222,-12.1) Q1.2@5.987,-11.335 ; 5.493,-11.018 ccw(c5.493,-10.319) Q1.2@5.987,-10.813
PW_VCC: C2.1 C3.2 D44.2 D45.2 D46.2 D47.2 D48.2 D50.2 D52.2 D53.2 D55.2 D56.2 J4.1 P36.1 P38.1 P39.4 P40.1 P48.1 P53.1 P56.10 P57.10 P58.10 P59.10 P60.1 P62.1 R2.2 R46.2 R47.2 R48.2 R52.2 R55.2 R56.2 R62.2 R63.2 R64.2 R70.2 R71.2 R72.2 R78.2 R79.2 R80.2 R97.1 R101.2 R105.1 R106.1 R110.2 R114.1 R120.2 R126.2 U40.6 U42.6 U43.6 U45.6 U46.6 U49.6 U50.6 U53.6 U54.6 U56.6 | length 811.8
  Top Layer w0.762: J4.1@3.785,-8.137 cw(c3.785,-9.632) 4.841,-8.575 cw(c5.898,-7.518) J4.1@4.404,-7.518 ; J4.1@3.785,-7.518 5.944,-9.677 R106.1@6.858,-9.677 6.858,-10.947 6.909,-10.998 ; 4.953,-8.687 ccw(c6.731,-6.909) R106.1@6.731,-9.423 ; R2.2@6.909,-13.106 6.909,-10.998 ; C3.2@19.369,-12.521 ccw(c20.583,-12.894) 19.685,-13.792 ; C2.1@23.894,-14.053 ccw(c23.265,-14.683) 23.265,-13.792 ccw(c23.265,-12.901) C2.1@23.894,-13.531 ; C2.1@24.416,-14.053 cw(c25.046,-14.683) 25.046,-13.792 cw(c25.046,-12.901) C2.1@24.416,-13.531 ; v1(27.026,-83.541) 27.026,-73.762 27.788,-73 ; 27.58,-73.207 cw(c28.397,-74.024) v1@28.397,-72.869 ; v1@28.372,-73 27.788,-73 ; v1@28.452,-72.881 ccw(c28.205,-73.417) 27.788,-73 ; P36.1@29.152,-11.386 cw(c28.522,-12.016) 29.413,-12.016 cw(c30.304,-12.016) P36.1@29.674,-11.386 ; P36.1@29.413,-11.125 29.413,-12.979 28.6,-13.792 C2.1@24.155,-13.792 19.685,-13.792 ; U54.6@54.915,-31.802 52.909,-31.802 52.883,-31.775 ; U56.6@54.915,-27.712 52.935,-27.712 52.883,-27.661 ; U53.6@54.94,-23.598 53.364,-23.598 52.883,-24.079 52.883,-27.661 ; R78.2@59.817,-56.667 R70.2@59.817,-60.858 R56.2@59.817,-65.049 R48.2@59.817,-69.113 59.817,-71.78 58.598,-73 v1(52.146,-73) 52.095,-37.871 52.883,-37.084 52.883,-31.775 ; 92.051,-57.354 ccw(c93.41,-55.995) U42.6@93.41,-57.917 ; U40.6@94.01,-81.939 95.556,-81.939 96.241,-81.255 v2(96.241,-76.632) v2(96.241,-72.288) v1(96.241,-63.856) 96.241,-58.953 95.224,-57.936 U42.6@94.01,-57.936 92.633,-57.936 91.618,-56.921 91.618,-54.077 ; U43.6@94.01,-53.999 91.695,-53.999 91.618,-54.077 ; U45.6@94.082,-50.062 92.305,-50.062 91.618,-50.749 91.618,-54.077 ; v2(95.25,-86.97) R97.1@96.596,-86.97 ; R126.2@96.52,-6.909 97.46,-6.909 97.841,-6.528 97.841,-5.309 98.146,-5.004 98.146,-2.413 98.806,-1.753 101.702,-1.753 ; U50.6@100.66,-19.965 98.731,-19.965 98.069,-19.304 98.069,-16.104 ; U49.6@100.66,-16.079 98.094,-16.079 98.069,-16.104 ; U46.6@100.66,-12.193 100.66,-10.719 ; R120.2@101.818,-6.67 ccw(c101.088,-6.201) 101.702,-5.588 ; R120.2@102.032,-6.934 102.032,-5.918 101.702,-5.588 ; P48.1@106.352,-3.416 ccw(c105.183,-2.716) 106.147,-1.753 ; P48.1@106.446,-4.171 cw(c105.389,-5.228) 106.883,-5.228 cw(c108.378,-5.228) P48.1@107.321,-4.171 ; P48.1@106.51,-3.24 ccw(c105.942,-2.489) 106.883,-2.489 ; 106.837,-2.443 cw(c106.047,-3.233) P48.1@107.006,-3.807 ; R46.2@107.034,-46.992 cw(c106.539,-47.487) 107.239,-47.487 ; v2(107.163,-40.399) 107.163,-39.04 R62.2@107.188,-39.014 ; 107.163,-39.486 cw(c107.863,-39.486) R62.2@107.368,-38.991 ; R63.2@107.188,-73.558 108.661,-73.558 v2(109.195,-73.025) ; v2@107.213,-48.83 ccw(c107.913,-48.83) R110.2@107.418,-49.325 ; v2(107.213,-48.717) 107.213,-49.479 R110.2@107.239,-49.505 ; R46.2@107.213,-47.32 107.239,-47.346 v2@107.239,-48.717 ; R105.1@107.239,-54.839 107.467,-54.61 v2(109.271,-54.61) ; R64.2@107.239,-33.401 v2(107.239,-32.194) R72.2@107.239,-30.836 ; P48.1@107.257,-3.24 cw(c107.825,-2.489) 106.883,-2.489 ; R101.2@107.264,-62.865 108.941,-62.865 109.22,-62.586 v2(109.22,-61.62) ; R114.1@107.273,-6.741 ccw(c105.817,-6.349) 106.883,-5.283 ; R80.2@107.315,-25.197 107.264,-25.248 v2(108.712,-25.248) ; R114.1@107.518,-6.934 107.518,-5.918 106.883,-5.283 ; R105.1@107.545,-55.018 cw(c108.531,-56.004) 108.531,-54.61 ; R80.2@107.571,-24.941 ccw(c108.311,-24.201) v2@108.311,-25.248 ; R63.2@107.62,-73.558 ccw(c107.62,-71.45) v2@109.11,-72.941 ; 108.166,-25.209 ccw(c108.332,-24.589) v2@108.653,-25.145 ; P39.4@110.176,-9.337 cw(c108.681,-9.337) 109.738,-10.394 cw(c110.795,-11.451) P39.4@110.795,-9.956 ; P39.4@110.795,-9.337 109.413,-10.719 100.66,-10.719 ; 6.909,-10.998 7.264,-11.354 16.256,-11.354 17.221,-12.319 C3.2@19.126,-12.319 19.126,-13.233 19.685,-13.792 ; 52.883,-31.775 52.883,-27.661 ; 98.069,-16.104 98.069,-11.844 99.195,-10.719 100.66,-10.719 ; 101.702,-5.588 101.702,-1.753 ; 101.702,-1.753 106.147,-1.753 ; 106.147,-1.753 106.883,-2.489 ; 106.883,-5.283 P48.1@106.883,-3.734 106.883,-2.489
  Bottom Layer w0.762: J4.1@3.347,-7.081 ccw(c2.29,-6.024) 3.785,-6.024 ccw(c5.279,-6.024) J4.1@4.222,-7.081 ; J4.1@3.785,-7.518 3.785,-3.378 6.629,-0.533 17.551,-0.533 ; P62.1@17.114,-3.296 ccw(c16.057,-2.239) 17.551,-2.239 ccw(c19.046,-2.239) P62.1@17.989,-3.296 ; P62.1@17.551,-3.734 17.551,-0.533 ; P56.10@18.313,-92.344 19.802,-92.344 20.396,-92.939 20.396,-95.606 21.311,-96.52 25.578,-96.52 ; P56.10@18.574,-92.605 cw(c19.204,-93.235) 19.204,-92.344 cw(c19.204,-91.454) P56.10@18.574,-92.083 ; v1(27.026,-83.541) 27.026,-88.595 25.578,-90.043 25.578,-96.52 ; v1(28.397,-73) v1(52.146,-73) ; P36.1@29.317,-11.029 P36.1@29.413,-11.125 ; P57.10@38.913,-92.344 40.401,-92.344 41.097,-93.04 41.097,-96.52 ; P57.10@39.174,-92.605 cw(c39.804,-93.235) 39.804,-92.344 cw(c39.804,-91.454) P57.10@39.174,-92.083 ; P60.1@40.609,-3.296 ccw(c39.552,-2.239) 41.046,-2.239 ccw(c42.541,-2.239) P60.1@41.484,-3.296 ; P60.1@41.046,-3.734 41.046,-0.584 ; P58.10@59.563,-92.344 60.95,-92.344 61.57,-92.964 61.57,-96.52 ; P58.10@59.824,-92.605 cw(c60.454,-93.235) 60.454,-92.344 cw(c60.454,-91.454) P58.10@59.824,-92.083 ; 68.632,2.205 cw(c68.632,1.418) D47.2@69.188,1.974 ; D47.2@69.547,1.974 cw(c70.103,1.418) 70.103,2.205 ; 72.061,2.205 cw(c72.061,1.418) D45.2@72.617,1.974 ; D45.2@72.976,1.974 cw(c73.532,1.418) 73.532,2.205 ; 75.617,2.205 cw(c75.617,1.418) D44.2@76.173,1.974 ; D44.2@76.532,1.974 cw(c77.088,1.418) 77.088,2.205 ; P59.10@80.289,-92.344 81.702,-92.344 82.347,-92.989 82.347,-96.52 ; P59.10@80.55,-92.605 cw(c81.18,-93.235) 81.18,-92.344 cw(c81.18,-91.454) P59.10@80.55,-92.083 ; P38.1@82.9,-3.296 ccw(c81.843,-2.239) 83.337,-2.239 ccw(c84.832,-2.239) P38.1@83.775,-3.296 ; P38.1@83.337,-3.734 83.337,2.128 ; P40.1@87.462,-90.252 cw(c86.405,-91.309) 87.9,-91.309 cw(c89.394,-91.309) P40.1@88.337,-90.252 ; P40.1@87.462,-89.377 ccw(c86.405,-88.32) 87.9,-88.32 ccw(c89.394,-88.32) P40.1@88.337,-89.377 ; v2(95.25,-86.97) 89.179,-86.97 87.9,-88.249 P40.1@87.9,-89.814 87.9,-96.409 88.011,-96.52 ; 95.606,2.205 cw(c95.606,1.418) D50.2@96.163,1.974 ; v2(96.19,-67.666) 96.19,-65.862 R71.2@96.241,-65.811 ; 96.19,-66.547 cw(c96.976,-66.547) R71.2@96.42,-65.991 ; R47.2@96.241,-77.876 v2(96.241,-76.632) ; R55.2@96.241,-73.812 v2(96.241,-72.288) ; v1@96.241,-63.906 107.645,-63.906 108.788,-65.049 116.637,-65.049 ; v1(96.241,-63.856) R79.2@96.241,-61.883 ; D50.2@96.522,1.974 cw(c97.078,1.418) 97.078,2.205 ; 99.137,2.205 cw(c99.137,1.418) D48.2@99.693,1.974 ; D48.2@100.052,1.974 cw(c100.609,1.418) 100.609,2.205 ; 102.668,2.205 cw(c102.668,1.418) D46.2@103.224,1.974 ; D46.2@103.583,1.974 cw(c104.139,1.418) 104.139,2.205 ; P48.1@106.446,-3.296 ccw(c105.389,-2.239) 106.883,-2.239 ccw(c108.378,-2.239) 107.321,-3.296 ccw(c108.378,-2.239) 108.378,-3.734 ccw(c108.378,-5.228) P48.1@107.321,-4.171 ; 106.883,2.154 P48.1@106.883,-3.734 112.141,-3.734 116.688,-8.28 116.688,-9.246 ; v2(107.163,-40.399) 107.163,-39.345 107.721,-38.786 116.688,-38.786 ; v2(107.213,-48.717) 108.331,-48.717 108.864,-49.251 108.864,-50.521 109.347,-51.003 116.637,-51.003 116.688,-50.952 ; v2(107.239,-32.194) 108.674,-30.759 116.688,-30.759 ; 107.32,2.205 63.673,2.205 60.935,-0.533 17.551,-0.533 ; v2(108.712,-25.248) 109.728,-26.264 116.611,-26.264 116.688,-26.187 ; v2(109.195,-73.025) 116.688,-73.025 ; v2(109.22,-61.62) 116.662,-61.62 116.688,-61.646 ; v2(109.271,-54.61) 116.688,-54.61 ; 109.488,-89.013 cw(c110.392,-89.918) P53.1@110.96,-88.772 ; P53.1@110.415,-89.289 ccw(c109.601,-89.946) 109.601,-88.9 ; P53.1@110.415,-88.511 cw(c109.601,-87.854) 109.601,-88.9 ; P53.1@110.621,-89.455 ccw(c109.895,-90.921) 108.737,-89.764 ; P39.4@110.795,-9.337 116.596,-9.337 116.688,-9.246 ; P53.1@110.896,-89.205 114.452,-89.205 116.688,-86.97 116.688,-73.025 ; P53.1@110.896,-88.9 109.601,-88.9 ; P39.4@111.232,-9.775 cw(c112.289,-10.832) 112.289,-9.337 cw(c112.289,-7.843) P39.4@111.232,-8.9 ; P53.1@111.334,-88.462 ccw(c113.127,-86.67) 113.127,-89.205 ; 116.688,-83.485 cw(c118.15,-83.485) D56.2@117.116,-82.45 ; 116.688,-81.057 ccw(c118.15,-81.057) D56.2@117.116,-82.091 ; 116.688,-60.847 cw(c117.89,-60.847) D52.2@117.04,-59.997 ; 116.688,-58.787 ccw(c117.89,-58.787) D52.2@117.04,-59.637 ; 116.688,-57.316 cw(c117.89,-57.316) D53.2@117.04,-56.466 ; 116.688,-55.256 ccw(c117.89,-55.256) D53.2@117.04,-56.107 ; 116.688,-53.898 cw(c117.977,-53.898) D55.2@117.065,-52.986 ; 116.688,-51.715 ccw(c117.977,-51.715) D55.2@117.065,-52.627 ; 25.578,-96.52 41.097,-96.52 ; 41.097,-96.52 61.57,-96.52 ; 61.57,-96.52 82.347,-96.52 ; 82.347,-96.52 88.011,-96.52 ; 88.011,-96.52 107.137,-96.52 108.737,-94.92 108.737,-89.764 ; 108.737,-89.764 109.601,-88.9 ; 116.688,-73.025 116.688,-61.646 ; 116.688,-61.646 116.688,-54.61 ; 116.688,-54.61 116.688,-50.952 ; 116.688,-50.952 116.688,-38.786 ; 116.688,-38.786 116.688,-30.759 ; 116.688,-30.759 116.688,-26.187 ; 116.688,-26.187 116.688,-9.246
PWM1: P37.4 U48.2 | length 66
  Top Layer w0.254: U48.2@53.924,-42.52 v1@55.702,-42.52 ; U48.2@54.746,-42.681 cw(c55.136,-43.071) 55.136,-42.52 cw(c55.136,-41.968) U48.2@54.746,-42.358 ; 55.333,-42.52 cw(c55.333,-42.99) v1@55.666,-42.657 ; v1@61.366,-42.545 61.366,-42.501 62.103,-41.765 62.103,-33.045 v1(62.078,-33.02) ; v1@61.515,-42.57 cw(c62.04,-42.57) 61.669,-42.199 ; v1@75.946,-32.995 77.343,-32.995 78.308,-32.029 78.308,-13.716 79.807,-12.217 79.807,-9.83 P37.4@81.051,-8.585 ; v1@76.033,-33.107 cw(c76.304,-33.378) 76.304,-32.995 ; P37.4@80.428,-8.585 cw(c78.924,-8.585) 79.988,-9.649 cw(c81.051,-10.712) P37.4@81.051,-9.208 ; P37.4@80.682,-8.585 cw(c79.792,-8.585) 80.421,-9.215 cw(c81.051,-9.845) P37.4@81.051,-8.954
  Bottom Layer w0.254: v1(55.753,-42.57) v1(61.392,-42.57) ; v1@55.84,-42.657 cw(c56.05,-42.867) 56.05,-42.57 cw(c56.05,-42.273) v1@55.84,-42.483 ; v1@61.305,-42.657 ccw(c61.095,-42.867) 61.095,-42.57 ccw(c61.095,-42.273) v1@61.305,-42.483 ; v1(62.078,-33.02) v1(75.946,-33.02) ; v1@62.165,-33.107 cw(c62.375,-33.317) 62.375,-33.02 cw(c62.375,-32.723) v1@62.165,-32.933 ; v1@75.859,-33.107 ccw(c75.649,-33.317) 75.649,-33.02 ccw(c75.649,-32.723) v1@75.859,-32.933
PWM2: P37.3 U52.3 | length 66.7
  Top Layer w0.254: U52.3@53.924,-48.463 v1@55.474,-48.463 ; U52.3@54.746,-48.625 cw(c55.136,-49.015) 55.136,-48.463 cw(c55.136,-47.911) U52.3@54.746,-48.302 ; 55.141,-48.463 cw(c55.141,-48.847) v1@55.412,-48.576 ; v1(61.697,-48.489) 62.128,-48.489 62.636,-47.981 v1(62.636,-34.087) ; v1@61.784,-48.576 cw(c61.994,-48.786) 61.994,-48.489 cw(c61.994,-48.192) v1@61.784,-48.402 ; v1@75.946,-34.011 77.8,-34.011 78.918,-32.893 78.918,-14.122 81.051,-11.989 ; v1@76.058,-34.123 cw(c76.33,-34.394) 76.33,-34.011 ; P37.3@80.855,-11.716 cw(c80.764,-11.989) 81.051,-11.989 ; P37.3@81.051,-11.125 81.051,-11.989 ; P37.3@81.248,-11.716 ccw(c81.338,-11.989) 81.051,-11.989
  Bottom Layer w0.254: v1(55.499,-48.489) v1(61.697,-48.489) ; v1@55.586,-48.576 cw(c55.796,-48.786) 55.796,-48.489 cw(c55.796,-48.192) v1@55.586,-48.402 ; v1@61.61,-48.576 ccw(c61.4,-48.786) 61.4,-48.489 ccw(c61.4,-48.192) v1@61.61,-48.402 ; v1(62.636,-34.087) 62.706,-34.017 75.952,-34.017 v1(75.971,-34.036) ; v1@62.723,-34.174 cw(c63.102,-34.552) 63.102,-34.017 ; 75.629,-34.017 cw(c75.629,-34.379) v1@75.884,-34.123 ; 75.72,-34.017 ccw(c75.72,-33.785) v1@75.884,-33.949
PWM3: P37.2 U48.3 | length 64.9
  Top Layer w0.254: U48.3@53.924,-41.25 v1@55.702,-41.25 ; U48.3@54.746,-41.411 cw(c55.136,-41.801) 55.136,-41.25 cw(c55.136,-40.698) U48.3@54.746,-41.088 ; 55.333,-41.25 cw(c55.333,-41.72) v1@55.666,-41.387 ; v1@61.112,-41.177 ccw(c61.112,-40.88) 61.322,-41.09 ccw(c61.532,-41.3) v1@61.235,-41.3 ; v1@61.138,-41.275 61.468,-40.945 61.468,-31.267 v1(61.697,-31.039) ; 61.468,-31.888 cw(c62.545,-31.888) v1@61.784,-31.126 ; 61.468,-31.274 cw(c61.932,-31.274) v1@61.604,-30.946 ; v1@61.574,-31.039 cw(c61.277,-31.039) 61.487,-31.249 cw(c61.697,-31.459) v1@61.697,-31.162 ; v1@75.946,-30.709 76.556,-30.709 77.191,-30.074 77.191,-9.906 P37.2@78.511,-8.585 ; v1@76.033,-30.596 ccw(c76.304,-30.325) 76.304,-30.709 ; P37.2@77.888,-8.585 cw(c76.384,-8.585) 77.448,-9.649 cw(c78.511,-10.712) P37.2@78.511,-9.208 ; P37.2@78.142,-8.585 cw(c77.252,-8.585) 77.881,-9.215 cw(c78.511,-9.845) P37.2@78.511,-8.954
  Bottom Layer w0.254: v1(55.753,-41.3) v1(61.112,-41.3) ; v1@55.84,-41.387 cw(c56.05,-41.597) 56.05,-41.3 cw(c56.05,-41.003) v1@55.84,-41.213 ; v1@61.025,-41.387 ccw(c60.815,-41.597) 60.815,-41.3 ccw(c60.815,-41.003) v1@61.025,-41.213 ; v1(61.697,-31.039) 62.052,-30.683 v1(75.946,-30.683) ; v1@61.697,-30.916 ccw(c61.697,-30.619) 61.907,-30.829 ccw(c62.117,-31.039) v1@61.82,-31.039 ; v1@75.859,-30.77 ccw(c75.649,-30.98) 75.649,-30.683 ccw(c75.649,-30.386) v1@75.859,-30.596
PWM4: P37.1 U52.2 | length 66.5
  Top Layer w0.254: U52.2@53.924,-49.733 v1@55.55,-49.733 ; U52.2@54.746,-49.895 cw(c55.136,-50.285) 55.136,-49.733 cw(c55.136,-49.181) U52.2@54.746,-49.572 ; 55.217,-49.733 ccw(c55.217,-49.35) v1@55.488,-49.621 ; v1@67.096,-49.621 ccw(c66.886,-49.411) 67.183,-49.411 ccw(c67.48,-49.411) v1@67.27,-49.621 ; v1@67.096,-31.964 cw(c66.886,-32.174) 67.183,-32.174 cw(c67.48,-32.174) v1@67.27,-31.964 ; v1(67.183,-49.708) v1(67.183,-31.877) ; v1@75.946,-31.852 76.962,-31.852 77.749,-31.064 77.749,-11.887 P37.1@78.511,-11.125 ; v1@76.033,-31.964 cw(c76.304,-32.235) 76.304,-31.852
  Bottom Layer w0.254: v1(55.575,-49.708) v1(67.183,-49.708) ; v1@55.662,-49.795 cw(c55.872,-50.005) 55.872,-49.708 cw(c55.872,-49.411) v1@55.662,-49.621 ; v1@67.096,-49.795 ccw(c66.886,-50.005) 66.886,-49.708 ccw(c66.886,-49.411) v1@67.096,-49.621 ; v1(67.183,-31.877) v1(75.946,-31.877) ; v1@67.27,-31.964 cw(c67.48,-32.174) 67.48,-31.877 cw(c67.48,-31.58) v1@67.27,-31.79 ; v1@75.859,-31.964 ccw(c75.649,-32.174) 75.649,-31.877 ccw(c75.649,-31.58) v1@75.859,-31.79
PWM11: P49.4 R121.2 U48.7 | length 76.5
  Top Layer w0.254: v1(37.635,-42.436) v1(37.635,-26.383) ; R121.2@44.967,-43.291 ccw(c44.224,-42.494) v1(45.314,-42.494) ; v1@45.207,-42.556 cw(c44.95,-42.704) 45.237,-42.781 ; v1@45.227,-42.581 cw(c45.017,-42.791) 45.314,-42.791 cw(c45.611,-42.791) v1@45.401,-42.581 ; 45.237,-42.781 cw(c45.524,-42.858) v1@45.375,-42.601 ; v1@45.252,-42.601 cw(c45.104,-42.858) 45.39,-42.781 ; R121.2@45.339,-43.688 R121.2@45.314,-43.663 ; 45.39,-42.781 cw(c45.677,-42.704) v1@45.42,-42.556 ; R121.2@45.66,-43.291 cw(c46.403,-42.494) v1(45.314,-42.494) ; R121.2@45.8,-44.022 cw(c46.667,-44.889) 46.667,-43.663 cw(c46.667,-42.436) R121.2@45.8,-43.303 ; 47.273,-43.125 cw(c48.184,-44.036) U48.7@48.184,-42.748 ; 47.707,-42.692 cw(c48.184,-43.169) U48.7@48.184,-42.494 ; U48.7@48.844,-42.52 47.879,-42.52 46.736,-43.663 R121.2@45.314,-43.663 ; R121.2@45.314,-43.663 v1(45.314,-42.494)
  Bottom Layer w0.254: P49.4@3.785,-26.383 v1(37.635,-26.383) ; P49.4@4.222,-26.821 cw(c5.279,-27.877) 5.279,-26.383 cw(c5.279,-24.888) P49.4@4.222,-25.945 ; P49.4@4.402,-27 cw(c5.892,-28.49) 5.892,-26.383 cw(c5.892,-24.275) P49.4@4.402,-25.765 ; v1@37.548,-26.47 ccw(c37.338,-26.68) 37.338,-26.383 ccw(c37.338,-26.086) v1@37.548,-26.296 ; v1(37.635,-42.436) 37.694,-42.494 v1(45.314,-42.494) ; v1@37.722,-42.349 ccw(c38.073,-41.997) 38.073,-42.494 ; v1@45.227,-42.581 ccw(c45.017,-42.791) 45.017,-42.494 ccw(c45.017,-42.197) v1@45.227,-42.407
PWM22: P51.4 R132.1 U52.6 | length 55.4
  Top Layer w0.254: v1@45.252,-46.264 cw(c45.042,-46.474) 45.339,-46.474 cw(c45.636,-46.474) v1@45.426,-46.264 ; R132.1@45.339,-47.346 R132.1@45.314,-47.32 ; v1(45.339,-46.177) 45.339,-47.295 R132.1@45.314,-47.32 ; R132.1@45.818,-47.661 cw(c46.584,-48.352) 46.584,-47.32 ; R132.1@45.818,-46.98 ccw(c46.584,-46.288) 46.584,-47.32 ; 47.013,-47.75 ccw(c48.184,-46.579) U52.6@48.184,-48.235 ; 47.447,-48.183 ccw(c48.184,-47.446) U52.6@48.184,-48.489 ; U52.6@48.001,-48.6 ccw(c47.727,-48.806) 47.727,-48.463 ; U52.6@48.001,-48.326 cw(c47.727,-48.12) 47.727,-48.463 ; U52.6@48.844,-48.463 47.727,-48.463 ; R132.1@45.314,-47.32 46.584,-47.32 ; 46.584,-47.32 47.727,-48.463
  Bottom Layer w0.254: P51.4@3.785,-45.162 4.8,-46.177 ; P51.4@3.972,-45.752 cw(c4.131,-46.255) 4.504,-45.882 cw(c4.877,-45.509) P51.4@4.375,-45.35 ; P51.4@4.049,-45.994 cw(c4.274,-46.703) 4.8,-46.177 ; P51.4@4.617,-45.426 ccw(c5.325,-45.651) 4.8,-46.177 ; v1@45.252,-46.264 ccw(c45.042,-46.474) 45.042,-46.177 ccw(c45.042,-45.88) v1@45.252,-46.09 ; v1(45.339,-46.177) 4.8,-46.177
PWM33: P52.4 R117.1 U48.6 | length 96.1
  Top Layer w0.254: v1@30.418,-39.152 cw(c29.912,-39.659) 30.628,-39.659 ; v1(30.505,-39.065) 30.628,-39.188 v1(30.628,-64.563) ; v1@30.541,-64.476 ccw(c30.331,-64.266) 30.628,-64.266 ccw(c30.925,-64.266) v1@30.715,-64.476 ; R117.1@44.954,-40.128 ccw(c44.21,-39.384) v1@45.263,-39.384 ; v1@45.156,-39.203 cw(c44.714,-39.458) 45.207,-39.591 ; v1@45.176,-39.228 cw(c44.966,-39.438) 45.263,-39.438 cw(c45.56,-39.438) v1@45.35,-39.228 ; v1@45.201,-39.248 cw(c45.053,-39.505) 45.34,-39.428 ; 45.263,-39.753 ccw(c46.046,-39.753) R117.1@45.493,-40.308 ; 45.34,-39.428 cw(c45.627,-39.351) v1@45.369,-39.203 ; R117.1@45.672,-40.128 cw(c46.656,-39.141) v1(45.263,-39.141) 45.263,-40.437 R117.1@45.314,-40.488 46.736,-40.488 47.498,-41.25 U48.6@48.844,-41.25 ; R117.1@45.8,-40.847 cw(c46.667,-41.714) 46.667,-40.488 cw(c46.667,-39.261) R117.1@45.8,-40.128 ; U48.6@48.022,-41.411 ccw(c47.632,-41.801) 47.632,-41.25 ccw(c47.632,-40.698) U48.6@48.022,-41.088
  Bottom Layer w0.254: P52.4@3.504,-64.12 ccw(c4.574,-63.05) 4.574,-64.563 ; P52.4@3.683,-63.94 ccw(c5.187,-62.437) 5.187,-64.563 ; P52.4@3.785,-63.839 4.508,-64.563 v1(30.628,-64.563) ; P52.4@3.863,-63.761 ccw(c5.8,-61.824) 5.8,-64.563 ; P52.4@4.043,-63.581 ccw(c6.413,-61.21) 6.413,-64.563 ; P52.4@4.222,-63.401 ccw(c7.026,-60.597) 7.026,-64.563 ; P52.4@4.402,-63.222 ccw(c7.64,-59.984) 7.64,-64.563 ; v1(30.505,-39.065) 45.187,-39.065 v1(45.263,-39.141) ; v1@30.541,-64.65 ccw(c30.331,-64.86) 30.331,-64.563 ccw(c30.331,-64.266) v1@30.541,-64.476 ; v1@30.592,-39.152 cw(c30.802,-39.362) 30.802,-39.065 cw(c30.802,-38.768) v1@30.592,-38.978 ; 44.782,-39.065 cw(c44.782,-39.622) v1@45.176,-39.228
PWM44: P54.4 R134.2 U52.7 | length 89.4
  Top Layer w0.254: v1@29.631,-81.142 ccw(c29.421,-80.932) 29.718,-80.932 ccw(c30.015,-80.932) v1@29.805,-81.142 ; v1(29.718,-81.229) 29.718,-52.197 v1(30.048,-51.867) ; R134.2@44.954,-50.727 cw(c44.087,-51.595) 45.314,-51.595 ; v1@45.227,-51.805 ccw(c45.017,-51.595) 45.314,-51.595 ; v1(45.314,-51.892) R134.2@45.314,-50.368 46.507,-50.368 ; v1@45.401,-51.805 cw(c45.611,-51.595) 45.314,-51.595 ; R134.2@45.673,-50.727 ccw(c46.54,-51.595) 45.314,-51.595 ; R134.2@45.835,-50.688 cw(c46.507,-51.234) 46.507,-50.368 ; R134.2@45.835,-50.048 ccw(c46.507,-49.502) 46.507,-50.368 ; U52.7@48.022,-49.895 ccw(c47.632,-50.285) 47.632,-49.733 ccw(c47.632,-49.181) U52.7@48.022,-49.572 ; U52.7@48.844,-49.733 47.142,-49.733 46.507,-50.368
  Bottom Layer w0.254: P54.4@3.785,-82.636 29.327,-82.636 29.718,-82.245 v1(29.718,-81.229) ; P54.4@4.222,-83.074 cw(c5.279,-84.13) 5.279,-82.636 cw(c5.279,-81.142) P54.4@4.222,-82.198 ; P54.4@4.402,-83.253 cw(c5.892,-84.744) 5.892,-82.636 cw(c5.892,-80.528) P54.4@4.402,-82.019 ; v1@29.631,-81.316 cw(c29.421,-81.526) 29.718,-81.526 cw(c30.015,-81.526) v1@29.805,-81.316 ; v1(30.048,-51.867) 30.074,-51.892 v1(45.314,-51.892) ; v1@30.135,-51.78 ccw(c30.406,-51.509) 30.406,-51.892 ; v1@45.227,-51.979 ccw(c45.017,-52.189) 45.017,-51.892 ccw(c45.017,-51.595) v1@45.227,-51.805
QD_KR1: D22.K P43.1 | length 11
  Top Layer w0.254: D22.K@107.179,-28.355 cw(c107.952,-29.128) 107.952,-28.035 cw(c107.952,-26.941) D22.K@107.179,-27.715 ; D22.K@107.231,-28.035 P43.1@110.864,-28.035 ; 108.711,-28.035 cw(c108.711,-30.252) P43.1@110.279,-28.684 ; 108.866,-28.035 ccw(c108.866,-26.037) P43.1@110.279,-27.45 ; 109.324,-28.035 cw(c109.324,-29.639) P43.1@110.459,-28.505 ; 109.48,-28.035 ccw(c109.48,-26.65) P43.1@110.459,-27.629
QYG_KC1: P36.32 U40.3 | length 113.5
  Top Layer w0.254: v1(66.142,-71.145) 66.091,-71.095 66.091,-16.176 68.758,-13.509 68.758,-9.83 P36.32@67.513,-8.585 ; P36.32@67.513,-9.208 cw(c67.513,-10.712) 68.577,-9.649 cw(c69.64,-8.585) P36.32@68.136,-8.585 ; P36.32@67.513,-8.954 cw(c67.513,-9.845) 68.143,-9.215 cw(c68.773,-8.585) P36.32@67.882,-8.585 ; U40.3@100.66,-79.399 101.855,-79.399 ; U40.3@101.467,-79.577 cw(c101.855,-79.911) 101.855,-79.399 ; U40.3@101.467,-79.221 ccw(c101.855,-78.888) 101.855,-79.399 ; v1@102.097,-78.675 cw(c101.887,-78.885) 102.184,-78.885 cw(c102.481,-78.885) v1@102.271,-78.675 ; v1(102.184,-78.588) 102.184,-79.07 101.855,-79.399
  Bottom Layer w0.254: v1(66.142,-71.145) 66.65,-71.653 77.622,-71.653 78.765,-72.796 78.765,-75.133 79.458,-75.825 80.601,-75.825 80.62,-75.844 90.056,-75.844 90.075,-75.825 101.276,-75.825 102.184,-76.733 v1(102.184,-78.588) ; v1@102.097,-78.501 ccw(c101.887,-78.291) 102.184,-78.291 ccw(c102.481,-78.291) v1@102.271,-78.501